# Altium PCB PCB_23GXSTM32F1031.0EXP_2026-02-23.pcbdoc (part 2 of 2)
Units mil, origin at the board's own origin, x right, y up, seen from the top; angles counter-clockwise.
Board outline 5147 x 5153.94 mil, 2 copper layers (Top Layer, Bottom Layer); 48 components, 78 nets, 348 pads, 55 vias.
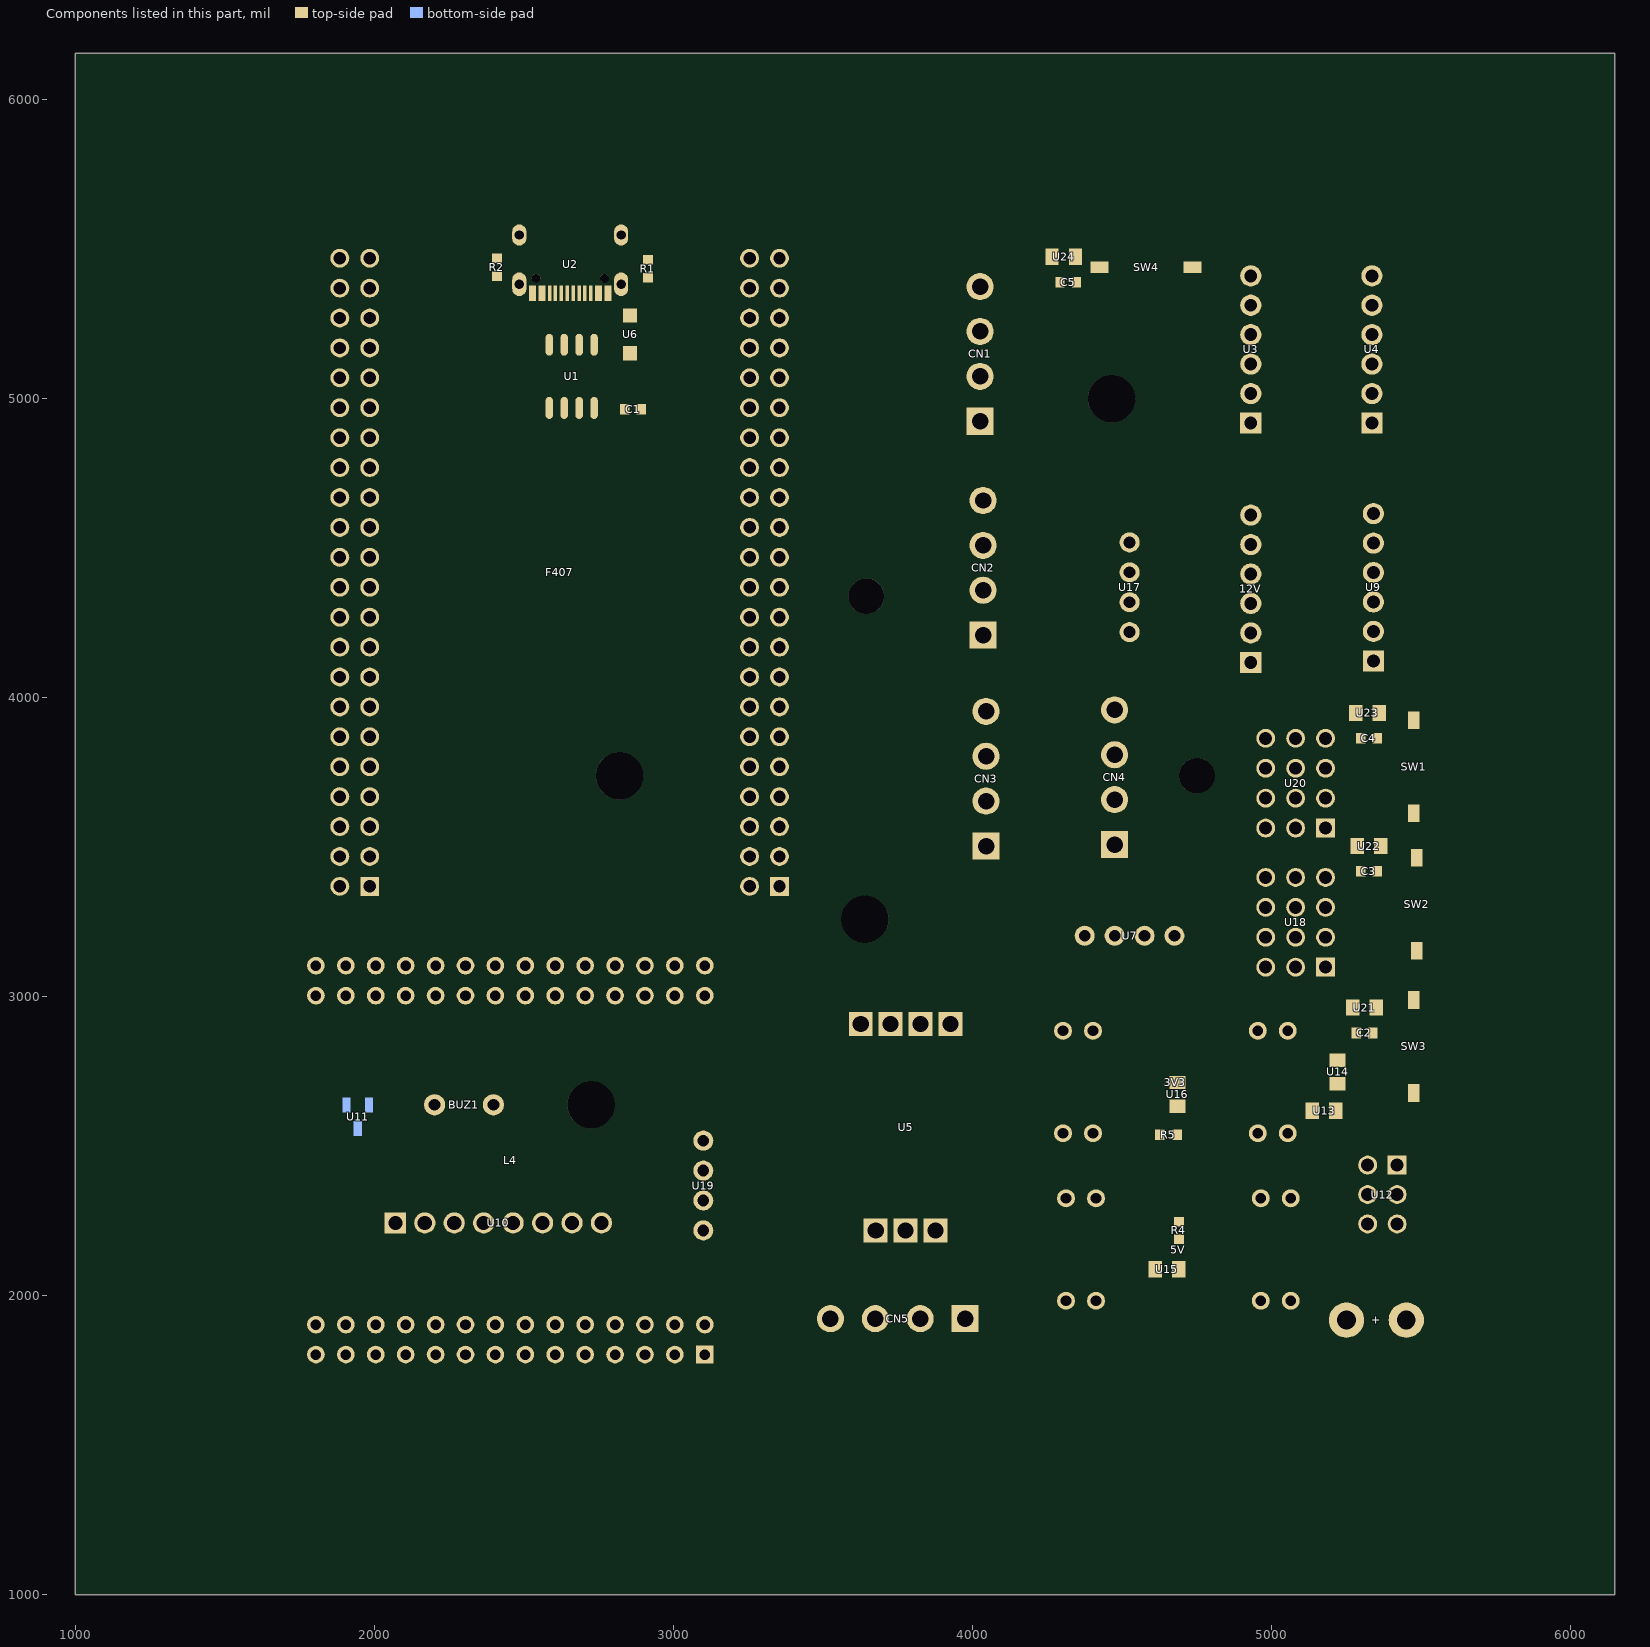
[diagram p2: the components of this part, seen from the top]

## Other copper
Top Layer:
  region net RX3: 2647.4,4992.09 2622.6,4992.09 2630,5007.09 2640,5007.09
  region net TX3: 2697.4,4943.46 2672.6,4943.46 2680,4928.46 2690,4928.46
  region net V3: 2747.4,4975.89 2747.4,4950.89 2762.4,4958.39 2762.4,4968.39
  region net D-: 2697.4,5203.31 2672.6,5203.31 2680,5218.31 2690,5218.31
  region net D+: 2747.4,5203.31 2722.6,5203.31 2730,5218.31 2740,5218.31
  region net 5V: 2572.6,4943.46 2572.6,4992.09 2535.1,4980.29 2535.1,4955.29
  region net 5V: 2597.4,4992.09 2572.6,4992.09 2580,5007.09 2590,5007.09
  region net OPRX: 3950,1968.66 4000,1968.66 3985,1998.66 3965,1998.66
  region net OPG: 3701.3,2178.39 3651.3,2178.39 3666.3,2148.39 3686.3,2148.39
  region net OPTX: 3801.3,2178.39 3751.3,2178.39 3766.3,2148.39 3786.3,2148.39
  region net OPRX: 3901.3,2178.39 3851.3,2178.39 3866.3,2148.39 3886.3,2148.39
  region net TX1: 3586.3,2895.89 3586.3,2920.89 3571.3,2913.39 3571.3,2903.39
  region net RX1: 3738.8,2868.39 3713.8,2868.39 3721.3,2853.39 3731.3,2853.39
  region net 5V: 3895.05,2948.39 3957.55,2948.39 3938.8,2985.89 3913.8,2985.89
  region net 5V: 3895.05,2948.39 3957.55,2948.39 3938.8,2957.09 3913.8,2957.09
  region net 5V: 3966.3,2939.64 3966.3,2877.14 4003.8,2895.89 4003.8,2920.89
  region net CC2: 2427.01,5455.59 2427.01,5480.59 2442.01,5473.09 2442.01,5463.09
  region net CC1: 2897.99,5475.59 2897.99,5450.59 2882.99,5458.09 2882.99,5468.09
  region net 3V3: 4609.47,2555.39 4609.47,2521.38 4579.47,2528.39 4579.47,2548.39
  region net M3V3: 4668.78,2555.39 4700.53,2555.39 4695,2585.39 4675,2585.39
  region net M3V3: 4700.53,2555.39 4700.53,2521.38 4730.53,2528.39 4730.53,2548.39
  region net M3V3: 4697.16,2521.38 4672.16,2521.38 4679.66,2506.38 4689.66,2506.38
  region net M5V: 4672.99,2172.86 4707.01,2172.86 4699.73,2142.86 4679.73,2142.86
  region net M5V: 4672.99,2201.23 4672.99,2176.23 4657.99,2183.73 4657.99,2193.73
  region net M3V3: 4660,2611.72 4710,2611.72 4695,2581.72 4675,2581.72
  region net 5V: 4588.34,2113.39 4588.34,2063.39 4558.34,2078.39 4558.34,2098.39
  region net M5V: 4667.08,2115.49 4711.66,2115.49 4699.74,2145.49 4679.74,2145.49
  region net M5V: 4711.66,2113.39 4711.66,2063.39 4741.66,2078.39 4741.66,2098.39
  region net M12V: 5195,2686.72 5245,2686.72 5230,2656.72 5210,2656.72
  region net 12V: 5113.34,2643.39 5113.34,2593.39 5085,2608.39 5085,2628.39
  region net M12V: 5195,2645.49 5236.66,2645.49 5230,2675.49 5210,2675.49
  region net M12V: 5236.66,2643.39 5236.66,2593.39 5266.66,2608.39 5266.66,2628.39
  region net PC5V: 2560.51,5325.39 2548.7,5325.39 2549.6,5310.39 2559.6,5310.39
  region net PC5V: 2572.32,5325.39 2560.51,5325.39 2561.4,5310.39 2571.4,5310.39
  region net PC5V: 2749.49,5325.39 2737.68,5325.39 2738.6,5310.39 2748.6,5310.39
  region net PC5V: 2761.3,5325.39 2749.49,5325.39 2750.4,5310.39 2760.4,5310.39
  region net CC2: 2580.2,5376.57 2592.01,5376.57 2591.1,5391.57 2581.1,5391.57
  region net D+: 2619.57,5376.57 2631.38,5376.57 2630.5,5391.57 2620.5,5391.57
  region net D-: 2651.06,5325.39 2639.25,5325.39 2640.2,5310.39 2650.2,5310.39
  region net D+: 2658.94,5376.57 2670.75,5376.57 2669.8,5391.57 2659.8,5391.57
  region net D+: 2670.75,5325.39 2658.94,5325.39 2659.8,5310.39 2669.8,5310.39
  region net D-: 2690.43,5325.39 2678.62,5325.39 2679.5,5310.39 2689.5,5310.39
  region net CC1: 2698.31,5376.57 2710.12,5376.57 2709.2,5391.57 2699.2,5391.57
  region net 5V: 2035.08,2230.89 2035.08,2255.89 2020.08,2248.39 2020.08,2238.39
  region net V3: 2821.69,4950.89 2821.69,4975.89 2806.69,4968.39 2806.69,4958.39
  region net 3V3VDE1: 4723,5458.07 4748,5458.07 4740.5,5473.07 4730.5,5473.07
  region net S$50933: 4394.96,5458.07 4417.32,5458.07 4396.89,5473.07 4382.75,5473.07
  region net S$51075: 5455.32,2959.37 5455.32,2981.7 5449.5,2970.46 5453.04,2959.85
  region net 3V3: 5455.32,2662.88 5455.32,2692.9 5437.31,2683.89 5437.31,2671.88
  region net 3V3: 5494.68,2692.9 5494.68,2662.88 5512.69,2671.88 5512.69,2683.89
  region net S$51065: 5465.32,3471.07 5465.32,3493.43 5450.32,3505.64 5450.32,3491.5
  region net 3V3: 5504.68,3167.9 5504.68,3137.88 5522.69,3146.88 5522.69,3158.89
  region net 3V3: 5469.99,3182.4 5500.01,3182.4 5491,3198.39 5479,3198.39
  region net S$50933: 4335.1,5406.1 4360.1,5406.1 4352.6,5421.1 4342.6,5421.1
  region net C5: 4243.34,5485.89 4243.34,5460.89 4228.34,5468.39 4228.34,5478.39
  region net S$50933: 4366.66,5485.89 4366.66,5460.89 4381.66,5468.39 4381.66,5478.39
  region net S$50933: 4360.1,5446.28 4335.1,5446.28 4342.6,5431.28 4352.6,5431.28
  region net S$51055: 5340.1,3881.1 5365.1,3881.1 5357.6,3896.1 5347.6,3896.1
  region net C4: 5258.34,3960.89 5258.34,3935.89 5243.34,3943.39 5243.34,3953.39
  region net S$51055: 5381.66,3960.89 5381.66,3935.89 5396.66,3943.39 5396.66,3953.39
  region net S$51055: 5365.1,3921.28 5340.1,3921.28 5347.6,3906.28 5357.6,3906.28
  region net S$51065: 5340.1,3436.1 5365.1,3436.1 5357.6,3451.1 5347.6,3451.1
  region net C0: 5263.34,3515.89 5263.34,3490.89 5248.34,3498.39 5248.34,3508.39
  region net S$51065: 5386.66,3515.89 5386.66,3490.89 5401.66,3498.39 5401.66,3508.39
  region net S$51065: 5365.1,3476.28 5342.08,3476.28 5347.6,3461.28 5357.6,3461.28
  region net S$51075: 5325.1,2896.1 5350.1,2896.1 5342.6,2911.1 5332.6,2911.1
  region net C1: 5248.34,2975.89 5248.34,2950.89 5245,2958.39 5245,2968.39
  region net S$51075: 5371.66,2975.89 5371.66,2950.89 5386.66,2958.39 5386.66,2968.39
  region net S$51075: 5350.1,2936.28 5327.08,2936.28 5332.6,2921.28 5342.6,2921.28
  region net S$51055: 5455.32,3931.07 5455.32,3953.43 5454.03,3951.92 5450.5,3941.32
  region net 3V3: 5494.68,3627.9 5494.68,3597.88 5512.69,3606.88 5512.69,3618.89
  region net 5V: 2867.5,5126.77 2842.5,5126.77 2850,5111.77 2860,5111.77
  region net PC5V: 2831.38,5263.88 2831.38,5288.88 2816.38,5281.38 2816.38,5271.38
  region net M5V: 4151,2295.45 4169,2295.45 4165,2287.05 4155,2287.05
  region net M3V3: 4151,2346.32 4169,2346.32 4165,2354.72 4155,2354.72
  region net M5V: 3453.42,2294.39 3453.42,2312.39 3445.02,2308.39 3445.02,2298.39
  region net M3V3: 3454.16,2329.39 3454.16,2347.39 3445.76,2343.39 3445.76,2333.39
  region net M5V: 3376,2246.32 3394,2246.32 3390,2254.72 3380,2254.72
  region net M3V3: 3392.94,2329.39 3392.94,2347.39 3401.34,2343.39 3401.34,2333.39
  region net C4: 2647.94,4209.39 2647.94,4227.39 2656.34,4223.39 2656.34,4213.39
  region net C5: 2637.94,4239.39 2637.94,4257.39 2646.34,4253.39 2646.34,4243.39
  region net C0: 2652.94,3414.39 2652.94,3432.39 2661.34,3428.39 2661.34,3418.39
  region net C1: 2642.94,3444.39 2642.94,3462.39 2651.34,3458.39 2651.34,3448.39
  region net C1: 4706.98,3452.63 4694.25,3465.36 4703.02,3468.47 4710.09,3461.4
  region net C0: 4691.98,3487.63 4679.25,3500.36 4688.02,3503.47 4695.09,3496.4
  region net C5: 3156,5066.32 3174,5066.32 3170,5074.72 3160,5074.72
  region net C5: 3156,4840.45 3174,4840.45 3170,4832.05 3160,4832.05
  region net C4: 4616,4020.45 4634,4020.45 4630,4012.05 4620,4012.05
  region net B0: 3440.41,4359.39 3440.41,4377.39 3432.01,4373.39 3432.01,4363.39
  region net B1: 3443.37,4309.39 3443.37,4327.39 3434.97,4323.39 3434.97,4313.39
  region net C4: 3442.06,4259.39 3442.06,4277.39 3433.66,4273.39 3433.66,4263.39
  region net D12: 3972.94,3129.39 3972.94,3147.39 3981.34,3143.39 3981.34,3133.39
  region net D13: 3972.94,3049.39 3972.94,3067.39 3981.34,3063.39 3981.34,3053.39
  region net D14: 3972.94,3019.39 3972.94,3037.39 3981.34,3033.39 3981.34,3023.39
  region net D15: 3972.94,2989.39 3972.94,3007.39 3981.34,3003.39 3981.34,2993.39
  region net D15: 2297.06,3284.39 2297.06,3302.39 2288.66,3298.39 2288.66,3288.39
  region net D14: 2297.06,3314.39 2297.06,3332.39 2288.66,3328.39 2288.66,3318.39
  region net D13: 2297.06,3344.39 2297.06,3362.39 2288.66,3358.39 2288.66,3348.39
  region net D12: 2297.06,3374.39 2297.06,3392.39 2288.66,3388.39 2288.66,3378.39
  region net RX5: 3544.24,3909.39 3544.24,3927.39 3552.64,3923.39 3552.64,3913.39
  region net TX5: 3544.98,3944.39 3544.98,3962.39 3553.38,3958.39 3553.38,3948.39
  region net SCL3: 4251.67,4436.86 4266.86,4446.53 4268.1,4437.36 4259.46,4431.86
  region net SDA3: 4246,4575.45 4264,4575.45 4260,4567.05 4250,4567.05
  region net SCL1: 3202.06,3299.39 3202.06,3317.39 3193.66,3313.39 3193.66,3303.39
  region net SDA1: 3207.06,3269.39 3207.06,3287.39 3198.66,3283.39 3198.66,3273.39
  region net SDA1: 3070.47,3309.25 3064.51,3292.26 3073.58,3292.74 3077.25,3303.2
  region net SCL1: 3062.94,3324.39 3062.94,3342.39 3071.34,3338.39 3071.34,3328.39
  region net RX2: 4202.94,3794.39 4202.94,3812.39 4211.34,3808.39 4211.34,3798.39
  region net TX2: 4232.94,3949.39 4232.94,3967.39 4241.34,3963.39 4241.34,3953.39
  region net PC5V: 2738.61,5292.16 2755.17,5299.22 2748.6,5305.55 2738.6,5301.29
  region net PC5V: 2744.13,5298.85 2761.12,5292.9 2760.4,5302.05 2750.4,5305.56
  region net PC5V: 2761.98,5289.14 2749.25,5276.41 2758.02,5273.3 2765.09,5280.37
  region net PC5V: 2565.75,5310.36 2553.02,5297.63 2551.06,5305.25 2558.14,5312.32
  region net PC5V: 2574.65,5305.52 2556.71,5307.07 2561.4,5315.09 2571.4,5314.23
  region net L4NSS1: 2036,2750.45 2054,2750.45 2050,2742.05 2040,2742.05
  region net L4NSS1: 1896,2766.32 1914,2766.32 1910,2774.72 1900,2774.72
  region net D-: 2633.99,5303.78 2651.06,5298.05 2650.2,5307.19 2640.2,5310.55
  region net D-: 2631,5285.45 2649,5285.45 2645,5277.05 2635,5277.05
  region net D-: 2695.75,5305.36 2683.02,5292.64 2680.97,5300.35 2688.04,5307.42
  region net L4SDA1: 3080.75,2491.01 3075.24,2540.9 3054.16,2518.39 3055.27,2508.39
  region net L4SCL1: 3077.87,2393.29 3077.87,2443.48 3060,2423.39 3060,2413.39
  region net 5V: 3122.13,2293.29 3122.13,2343.48 3145.56,2328.39 3145.56,2308.39
  region net D12: 4959.17,3374.76 4959.17,3422.01 4945,3403.39 4945,3393.39
  region net D13: 4959.17,3274.76 4959.17,3322.01 4937.12,3303.39 4937.12,3293.39
  region net D14: 4962.06,3172.5 4956.56,3219.42 4936.83,3198.39 4938,3188.39
  region net D15: 4965.25,3070.56 4954.23,3116.5 4937.1,3093.39 4939.5,3083.39
  region net 5V: 3558.96,1893.44 3491.04,1893.44 3515,1861.75 3535,1861.75
  region net 5V: 3543.21,1964.84 3481.6,1936.27 3489.41,1974.83 3508.74,1983.79
  region net 5V: 3495.05,1889.43 3495.05,1957.34 3463.36,1933.39 3463.36,1913.39
  region net OPG: 3641.68,1954.04 3709.58,1952.61 3686.3,1984.8 3666.3,1985.22
  region net OPTX: 3793.58,1955.99 3861.27,1950.48 3840,1984.01 3820,1985.64
  region net TX2: 4445.05,3924.43 4445.05,3992.34 4413.36,3963.39 4413.36,3953.39
  region net RX2: 4447.91,3772.11 4442.4,3839.8 4413.16,3808.39 4413.97,3798.39
  region net 5V: 4447.91,3622.11 4442.4,3689.8 4412.55,3665.89 4414.58,3640.89
  region net 5V: 4504.95,3624.43 4504.94,3692.34 4536.64,3670.89 4536.64,3645.89
  region net 5V: 4520.27,3658.15 4469.58,3703.34 4508.54,3711.07 4523.49,3697.74
  region net TX5: 4015.05,3919.43 4015.05,3987.34 3983.36,3958.39 3983.36,3948.39
  region net RX5: 4018.58,3766.62 4011.82,3834.19 3994.5,3803.39 3995.5,3793.39
  region net 5V: 4074.95,3619.43 4074.95,3687.34 4106.64,3665.89 4106.64,3640.89
  region net 5V: 4017.91,3617.11 4012.4,3684.8 3982.55,3660.89 3984.58,3635.89
  region net 3V3: 4424.87,2563.2 4419.58,2518.52 4441.89,2528.39 4444.26,2548.39
  region net 3V3: 4425.01,2563.05 4380.01,2563.03 4396.5,2584.04 4408.5,2584.04
  region net 12V: 5076.2,2563.03 5031.2,2563.03 5043.7,2584.03 5063.7,2584.03
  region net E15: 4907.34,5382.28 4905.86,5435.41 4889.86,5413.39 4890.14,5403.39
  region net E14: 4906.6,5337.65 4906.58,5284.5 4881.79,5306.09 4881.79,5316.09
  region net E13: 4906.86,5239.46 4906.32,5186.31 4881.74,5208.14 4881.84,5218.14
  region net E12: 5312.21,5382.39 5310.99,5435.52 5286.69,5413.39 5286.92,5403.39
  region net E11: 5313.11,5283.23 5310.15,5336.3 5286.59,5313.39 5287.14,5303.39
  region net E10: 5311.7,5239.31 5311.49,5186.16 5286.77,5207.84 5286.81,5217.84
  region net E6: 4956.59,4632.95 4903.44,4632.92 4925,4657.73 4935,4657.74
  region net E5: 4908.42,4482.99 4904.87,4536.02 4889.67,4513.39 4890.33,4503.39
  region net E4: 4906.9,4439.49 4906.29,4386.34 4881.73,4408.21 4881.85,4418.2
  region net E9: 5366.59,4637.95 5313.44,4637.92 5335,4662.73 5345,4662.74
  region net E8: 5318.17,4543.95 5315.09,4490.89 5299.71,4513.39 5300.29,4523.39
  region net E7: 5316.93,4444.51 5316.26,4391.37 5291.73,4413.25 5291.86,4423.25
  region net 5V: 2008.44,5447.35 2002.94,5494.28 2026.12,5485.89 2029.05,5460.89
  region net D12: 1915.33,4959.88 1872.77,4939.36 1898.85,4927.46 1908.39,4932.06
  region net D14: 1908.62,4847.55 1861.38,4847.55 1880,4833.39 1890,4833.39
  region net D13: 2005.83,4844.76 2005.83,4892.01 2027.88,4873.39 2027.88,4863.39
  region net D15: 2005.83,4744.76 2005.83,4792.01 2027.88,4773.39 2027.88,4763.39
  region net RX1: 1864.17,3544.76 1864.17,3592.01 1842.12,3573.39 1842.12,3563.39
  region net TX1: 2005.83,3544.76 2005.83,3592.01 2020,3573.39 2020,3563.39
  region net 3V3VDE1: 3378.3,5489.22 3331.06,5489.22 3349.68,5511.27 3359.68,5511.27
  region net RX3: 3378.45,4989.05 3331.21,4989.39 3349.99,5011.3 3359.99,5011.23
  region net TX3: 3233.85,4844.76 3233.85,4892.01 3211.8,4873.39 3211.8,4863.39
  region net E15: 3375.51,4844.76 3375.51,4892.01 3397.56,4873.39 3397.56,4863.39
  region net E14: 3278.31,4789.2 3231.07,4789.24 3249.7,4803.09 3259.7,4803.08
  region net E13: 3375.51,4744.76 3375.51,4792.01 3397.56,4773.39 3397.56,4763.39
  region net E12: 3284.19,4679.38 3240.08,4696.3 3264.93,4710.38 3275.15,4706.46
  region net E11: 3375.51,4644.76 3375.51,4692.01 3397.56,4673.39 3397.56,4663.39
  region net E10: 3285.05,4576.72 3242.61,4597.48 3268.77,4609.23 3278.27,4604.58
  region net E9: 3375.51,4544.76 3375.51,4592.01 3397.56,4573.39 3397.56,4563.39
  region net E8: 3286.17,4468.84 3250.29,4499.57 3278.76,4504.22 3286.38,4497.69
  region net E7: 3375.51,4444.76 3375.51,4492.01 3397.56,4473.39 3397.56,4463.39
  region net B1: 3286.02,4365.32 3247.71,4337.67 3275.66,4330.65 3283.88,4336.58
  region net B0: 3375.51,4344.76 3375.51,4392.01 3397.56,4373.39 3397.56,4363.39
  region net C5: 3233.85,4244.76 3233.85,4292.01 3211.8,4273.39 3211.8,4263.39
  region net C5: 3247.27,4237.77 3225.23,4279.56 3214.11,4253.39 3219.38,4243.39
  region net C4: 3375.51,4244.76 3375.51,4292.01 3397.56,4273.39 3397.56,4263.39
  region net C4: 3378.47,4247.74 3331.22,4247.36 3350,4228.35 3360,4228.43
  region net C1: 3236.74,3642.5 3231.23,3689.42 3211.5,3668.39 3212.68,3658.39
  region net C0: 3333.82,3644.78 3380.7,3650.65 3365,3626.46 3355,3625.21
  region net E6: 3375.51,3544.76 3375.51,3592.01 3397.56,3573.39 3397.56,3563.39
  region net E5: 3283.06,3482.05 3237.57,3494.83 3260.76,3511.22 3271.8,3508.12
  region net E4: 3375.51,3444.76 3375.51,3492.01 3397.56,3473.39 3397.56,3463.39
  region net 5V: 4325.81,1956.31 4284.17,1973.38 4287,1949.53 4307.06,1941.3
  region net 5V: 4292.69,1960.7 4292.67,2005.7 4271.67,1995.69 4271.68,1970.69
  region net 5V: 4435.01,2003.05 4390.01,2003.03 4402.5,2020.88 4422.5,2020.89
  region net 5V: 4600.1,3225.52 4549.9,3225.52 4562.5,3248.95 4587.5,3248.95
  region net M5V: 5299.97,2263.59 5299.94,2216.35 5277.9,2229.99 5277.92,2249.99
  region net M3V3: 5319.75,2369.86 5289.69,2333.42 5281.32,2357.92 5294.11,2373.42
  region net M12V: 5344.42,2457.63 5297.17,2457.64 5310.8,2479.69 5330.8,2479.68
  region net M12V: 5342.56,2414.04 5340.66,2461.25 5359.8,2443.39 5360.2,2433.39
  region net L4NSS1: 2636.49,2217.86 2689.46,2222.2 2670,2195.72 2660,2194.9
  region net DRDY: 2589.22,2266.82 2536.07,2266.82 2557.64,2291.63 2567.64,2291.63
  region net L4MISO1: 2490.78,2219.94 2437.63,2219.95 2459.2,2195.15 2469.2,2195.15
  region net L4MOSI1: 2392.15,2267.07 2339,2266.58 2360.35,2291.58 2370.35,2291.67
  region net L4SCK1: 2242.11,2218.53 2295.18,2221.44 2275,2195.49 2265,2194.94
  region net SDA3: 4502.87,4493.29 4502.87,4543.48 4479.44,4523.39 4479.44,4513.39
  region net SCL3: 4502.87,4393.29 4502.87,4443.48 4479.44,4423.39 4479.44,4413.39
  region net 5V: 4549.76,4340.9 4544.25,4291.01 4569.18,4303.39 4571.39,4323.39
  region net 5V: 1827.15,1922.92 1782.85,1922.92 1800,1943.59 1810,1943.59
  region net 5V: 1788.38,1878.98 1782.87,1922.93 1763.86,1908.39 1766.37,1888.39
  region net L4SCK1: 2027.15,1922.92 1982.85,1922.92 2000,1943.59 2010,1943.59
  region net L4SDA1: 2624.53,1781.24 2624.53,1825.53 2635,1808.39 2635,1798.39
  region net L4SCL1: 2727.15,1922.92 2682.85,1922.92 2700,1933.39 2710,1933.39
  region net L4NSS1: 1927.15,2983.86 1882.85,2983.86 1900,2963.19 1910,2963.19
  region net L4MISO1: 1931.94,3115.48 1913.64,3075.15 1939.4,3081.91 1943.82,3091.64
  region net L4MOSI1: 2027.15,2983.86 1982.85,2983.86 2000,2963.19 2010,2963.19
  region net DRDY: 2024.53,3081.24 2024.53,3125.53 2040,3108.39 2040,3098.39
Mid-Layer 2:
  region net TMOSI: 2527.15,3122.92 2482.85,3122.92 2500,3143.59 2510,3143.59
  region net TMISO: 2530.65,2988.77 2516.3,3030.67 2541.23,3021.68 2544.83,3011.15
  region net TNSS: 2424.53,2981.24 2424.53,3025.53 2435,3008.39 2435,2998.39
  region net TSCK: 2324.53,2981.24 2324.53,3025.53 2345,3008.39 2345,2998.39
  region net C1: 2227.15,3122.92 2182.85,3122.92 2200,3143.59 2210,3143.59
  region net C0: 2230.65,2988.77 2216.3,3030.67 2241.23,3021.68 2244.83,3011.15
  region net C5: 2127.15,3122.92 2082.85,3122.92 2100,3143.59 2110,3143.59
  region net C4: 2124.53,2981.24 2124.53,3025.53 2140,3008.39 2140,2998.39
  region net M12V: 2227.15,1783.86 2182.85,1783.86 2200,1763.19 2210,1763.19
  region net B13: 3375.51,5044.76 3375.51,5092.01 3397.56,5073.39 3397.56,5063.39
  region net B14: 3285.65,5074.08 3245.16,5098.41 3272.34,5107.8 3281.18,5102.49
  region net TMISO: 2546,3210.45 2564,3210.45 2560,3202.05 2550,3202.05
  region net TNSS: 2446,3255.45 2464,3255.45 2460,3247.05 2450,3247.05
  region net TMOSI: 2496,3225.45 2514,3225.45 2510,3217.05 2500,3217.05
  region net TSCK: 2406,3250.45 2424,3250.45 2420,3243.39 2410,3243.39
  region net TX5: 3097.94,4109.39 3097.94,4127.39 3106.34,4123.39 3106.34,4113.39
  region net RX5: 3087.94,3959.39 3087.94,3977.39 3096.34,3973.39 3096.34,3963.39
  region net SDA3: 3071,4576.32 3089,4576.32 3085,4583.39 3075,4583.39
  region net SCL3: 3087.94,4509.39 3087.94,4527.39 3096.34,4523.39 3096.34,4513.39
  region net SDA3: 4247.06,4574.39 4247.06,4592.39 4238.66,4588.39 4238.66,4578.39
  region net SCL3: 4247.06,4439.39 4247.06,4457.39 4238.66,4453.39 4238.66,4443.39
  region net TX5: 3529.1,3944.39 3529.1,3962.39 3520.7,3958.39 3520.7,3948.39
  region net RX5: 3528.36,3909.39 3528.36,3927.39 3519.96,3923.39 3519.96,3913.39
  region net D12: 2312.94,3374.39 2312.94,3392.39 2321.34,3388.39 2321.34,3378.39
  region net D13: 2312.94,3344.39 2312.94,3362.39 2321.34,3358.39 2321.34,3348.39
  region net D14: 2312.94,3314.39 2312.94,3332.39 2321.34,3328.39 2321.34,3318.39
  region net D15: 2312.94,3284.39 2312.94,3302.39 2321.34,3298.39 2321.34,3288.39
  region net D15: 3957.06,2989.39 3957.06,3007.39 3948.66,3003.39 3948.66,2993.39
  region net D14: 3957.06,3019.39 3957.06,3037.39 3948.66,3033.39 3948.66,3023.39
  region net D13: 3957.06,3049.39 3957.06,3067.39 3948.66,3063.39 3948.66,3053.39
  region net D12: 3957.06,3129.39 3957.06,3147.39 3948.66,3143.39 3948.66,3133.39
  region net C4: 3441,4260.45 3459,4260.45 3455,4252.05 3445,4252.05
  region net B1: 3459.25,4309.39 3459.25,4327.39 3467.65,4323.39 3467.65,4313.39
  region net B0: 3456.29,4359.39 3456.29,4377.39 3464.69,4373.39 3464.69,4363.39
  region net B14: 4213.75,5129.39 4213.75,5147.39 4205.35,5143.39 4205.35,5133.39
  region net B13: 4210.75,5004.39 4210.75,5022.39 4202.35,5018.39 4202.35,5008.39
  region net B0: 4622.06,4069.39 4622.06,4087.39 4613.66,4083.39 4613.66,4073.39
  region net B1: 4657.06,4044.39 4657.06,4062.39 4648.66,4058.39 4648.66,4048.39
  region net C4: 4617.06,4019.39 4617.06,4037.39 4608.66,4033.39 4608.66,4023.39
  region net C1: 2627.06,3444.39 2627.06,3462.39 2618.66,3458.39 2618.66,3448.39
  region net C0: 2637.06,3414.39 2637.06,3432.39 2628.66,3428.39 2628.66,3418.39
  region net C5: 2622.06,4239.39 2622.06,4257.39 2613.66,4253.39 2613.66,4243.39
  region net C4: 2632.06,4209.39 2632.06,4227.39 2623.66,4223.39 2623.66,4213.39
  region net M12V: 3457.06,1734.39 3457.06,1752.39 3448.66,1748.39 3448.66,1738.39
Bottom Layer:
  region net 12V: 4965.41,4952.71 4965.41,4881.85 5040.41,4892.28 5040.41,4942.28
  region net 12V: 4894.54,4881.85 4894.54,4952.71 4848.9,4942.28 4848.9,4892.28
  region net 12V: 5299.54,4881.85 5299.54,4952.71 5224.54,4942.28 5224.54,4892.28
  region net 12V: 4965.41,4152.71 4965.41,4081.85 5040.41,4092.28 5040.41,4142.28
  region net 12V: 4894.54,4081.85 4894.54,4152.71 4836.1,4142.28 4836.1,4092.28
  region net 12V: 5375.41,4086.85 5304.54,4086.85 5315,4011.85 5365,4011.85
  region net 12V: 5304.54,4086.85 5304.54,4157.71 5229.54,4142.28 5229.54,4092.28
  region net 3V3: 1932.5,2534.41 1957.5,2534.41 1950,2519.41 1940,2519.41
  region net BUZSWT: 1996.18,2625.29 1996.18,2650.29 2011.18,2642.79 2011.18,2632.79
  region net G: 1893.82,2650.29 1893.82,2625.29 1878.82,2632.79 1878.82,2642.79
  region net M5V: 4152.06,2294.39 4152.06,2312.39 4143.66,2308.39 4143.66,2298.39
  region net M3V3: 4152.06,2329.39 4152.06,2347.39 4143.66,2343.39 4143.66,2333.39
  region net M5V: 3469.29,2294.39 3469.29,2312.39 3477.69,2308.39 3477.69,2298.39
  region net M3V3: 3470.03,2329.39 3470.03,2347.39 3478.43,2343.39 3478.43,2333.39
  region net M5V: 3376,2230.45 3394,2230.45 3390,2222.05 3380,2222.05
  region net M3V3: 3385.75,2326.41 3373.02,2339.14 3369.91,2330.37 3376.98,2323.3
  region net C1: 4695.75,3441.41 4683.02,3454.14 4679.91,3445.37 4686.98,3438.3
  region net C0: 4680.75,3476.41 4668.02,3489.14 4664.91,3480.37 4671.98,3473.3
  region net C5: 3156,5050.45 3174,5050.45 3170,5042.05 3160,5042.05
  region net C5: 3156,4856.32 3174,4856.32 3170,4864.72 3160,4864.72
  region net B1: 4672.94,4044.39 4672.94,4062.39 4681.34,4058.39 4681.34,4048.39
  region net B0: 4637.94,4069.39 4637.94,4087.39 4646.34,4083.39 4646.34,4073.39
  region net B13: 4227.69,5021.33 4209.69,5021.32 4213.69,5029.72 4223.69,5029.72
  region net B14: 4229.63,5129.39 4229.63,5147.39 4238.03,5143.39 4238.03,5133.39
  region net SCL3: 3072.06,4509.39 3072.06,4527.39 3063.66,4523.39 3063.66,4513.39
  region net SDA3: 3072.06,4559.39 3072.06,4577.39 3063.66,4573.39 3063.66,4563.39
  region net SCL1: 3217.94,3299.39 3217.94,3317.39 3226.34,3313.39 3226.34,3303.39
  region net SDA1: 3206,3270.45 3224,3270.45 3220,3262.05 3210,3262.05
  region net SDA1: 3052.06,3294.39 3052.06,3312.39 3043.66,3308.39 3043.66,3298.39
  region net SCL1: 3047.06,3324.39 3047.06,3342.39 3038.66,3338.39 3038.66,3328.39
  region net RX2: 4186,3811.32 4204,3811.32 4200,3819.72 4190,3819.72
  region net TX2: 4216,3966.32 4234,3966.32 4230,3974.72 4220,3974.72
  region net RX5: 3072.06,3959.39 3072.06,3977.39 3063.66,3973.39 3063.66,3963.39
  region net TX5: 3082.06,4109.39 3082.06,4127.39 3073.66,4123.39 3073.66,4113.39
  region net PC5V: 2755.86,5277.91 2738.88,5283.88 2739.35,5274.81 2749.82,5271.13
  region net PC5V: 2572.94,5289.39 2572.94,5307.39 2581.34,5303.39 2581.34,5293.39
  region net TSCK: 2406,3266.32 2424,3266.32 2420,3274.72 2410,3274.72
  region net TMOSI: 2497.06,3224.39 2497.06,3242.39 2488.66,3238.39 2488.66,3228.39
  region net TNSS: 2462.94,3254.39 2462.94,3272.39 2471.34,3268.39 2471.34,3258.39
  region net TMISO: 2555.75,3206.41 2543.02,3219.14 2541.46,3211.92 2548.54,3204.85
  region net L4NSS1: 2037.06,2749.39 2037.06,2767.39 2028.66,2763.39 2028.66,2753.39
  region net L4NSS1: 1912.94,2749.39 1912.94,2767.39 1921.34,2763.39 1921.34,2753.39
  region net D-: 2647.94,5284.39 2647.94,5302.39 2656.34,5298.39 2656.34,5288.39
  region net D-: 2687.06,5284.39 2687.06,5302.39 2678.66,5298.39 2678.66,5288.39
  region net B14: 5003.62,3884.22 4956.38,3884.22 4975,3906.27 4985,3906.27
  region net 5V: 5103.62,3842.55 5056.38,3842.55 5070,3820.51 5090,3820.51
  region net B13: 4962.72,3737.06 4956.04,3783.82 4944.29,3763.39 4945.71,3753.39
  region net 5V: 5103.62,3742.55 5056.38,3742.55 5070,3720.51 5090,3720.51
  region net 5V: 5103.62,3784.22 5056.38,3784.22 5070,3806.27 5090,3806.27
  region net B0: 4959.17,3639.76 4959.17,3687.01 4937.12,3668.39 4937.12,3658.39
  region net 5V: 5103.62,3642.55 5056.38,3642.55 5070,3620.51 5090,3620.51
  region net 5V: 5103.62,3684.22 5056.38,3684.22 5070,3706.27 5090,3706.27
  region net B1: 4959.17,3539.76 4959.17,3587.01 4937.12,3568.39 4937.12,3558.39
  region net 5V: 5103.62,3542.55 5056.38,3542.55 5070,3520.51 5090,3520.51
  region net 5V: 5103.62,3584.22 5056.38,3584.22 5070,3606.27 5090,3606.27
  region net BUZSWT: 2178.48,2611.52 2177.81,2664.67 2153.28,2642.79 2153.41,2632.79
  region net 5V: 5103.62,3377.55 5056.38,3377.55 5070,3355.51 5090,3355.51
  region net 5V: 5103.62,3419.22 5056.38,3419.22 5070,3441.27 5090,3441.27
  region net 5V: 5103.62,3277.55 5056.38,3277.55 5070,3255.51 5090,3255.51
  region net 5V: 5103.62,3319.22 5056.38,3319.22 5070,3341.27 5090,3341.27
  region net 5V: 5103.62,3177.55 5056.38,3177.55 5070,3155.51 5090,3155.51
  region net 5V: 5103.62,3219.22 5056.38,3219.22 5070,3241.27 5090,3241.27
  region net 5V: 5058.97,3074.94 5105.89,3080.45 5095,3056.97 5075,3054.62
  region net 5V: 5103.62,3119.22 5056.38,3119.22 5070,3141.27 5090,3141.27
  region net 5V: 4445.06,3692.34 4445.05,3624.43 4413.36,3645.89 4413.36,3670.89
  region net TX4: 4005.05,4624.43 4005.05,4692.34 3973.36,4663.39 3973.36,4653.39
  region net RX4: 4005.05,4474.43 4005.05,4542.34 3973.36,4513.39 3973.36,4503.39
  region net 5V: 4072.31,4384.03 4055.78,4318.16 4091.65,4330.89 4097.92,4355.89
  region net 5V: 4079.1,4368.63 4019.32,4400.86 4052.77,4418.83 4075.74,4406.45
  region net 3V3: 4322.37,2565.7 4322.35,2520.7 4343.36,2533.19 4343.37,2553.19
  region net 3V3: 4325.02,2563.05 4280.02,2563.05 4290.02,2575.87 4315.02,2575.87
  region net 3V3: 4282.68,2520.71 4282.68,2565.71 4261.68,2553.21 4261.68,2533.21
  region net 3V3: 4382.68,2520.69 4382.67,2565.69 4361.67,2553.19 4361.68,2533.19
  region net 12V: 4933.86,2520.69 4933.85,2565.69 4912.85,2568.19 4912.86,2518.19
  region net 12V: 4973.55,2565.69 4973.54,2520.69 4994.54,2518.19 4994.55,2568.19
  region net 12V: 5033.86,2520.69 5033.86,2565.69 5012.86,2568.19 5012.86,2518.19
  region net 12V: 5076.2,2563.03 5031.2,2563.03 5028.7,2584.03 5078.7,2584.03
  region net TX6: 3997.91,5337.11 3992.4,5404.8 3963.16,5373.39 3963.97,5363.39
  region net RX6: 3995.05,5189.43 3995.05,5257.34 3963.36,5228.39 3963.36,5218.39
  region net 5V: 4057.6,5104.8 4052.09,5037.11 4085.42,5055.89 4087.45,5080.89
  region net 3V3: 1864.17,5344.76 1864.17,5392.01 1842.12,5380.89 1842.12,5355.89
  region net TX6: 1915.95,4774.25 1875.31,4798.36 1902.44,4807.9 1911.32,4802.63
  region net RX6: 2005.83,4644.76 2005.83,4692.01 2027.88,4673.39 2027.88,4663.39
  region net SCL3: 1916.33,4565.15 1877.87,4537.71 1905.78,4530.54 1914.03,4536.42
  region net SDA3: 2005.83,4544.76 2005.83,4592.01 2027.88,4573.39 2027.88,4563.39
  region net TX4: 1914.45,4279.55 1870.24,4296.21 1894.99,4310.45 1905.26,4306.57
  region net TX5: 1915.95,4162.52 1875.31,4138.42 1902.44,4128.87 1911.32,4134.14
  region net RX4: 2005.83,4144.76 2005.83,4192.01 2027.88,4173.39 2027.88,4163.39
  region net RX5: 2005.83,3944.76 2005.83,3992.01 2027.88,3973.39 2027.88,3963.39
  region net SDA1: 1908.62,3447.55 1861.38,3447.55 1880,3433.39 1890,3433.39
  region net SCL1: 2005.83,3444.76 2005.83,3492.01 2020,3473.39 2020,3463.39
  region net TMOSI: 3278.45,4147.72 3231.21,4147.38 3249.99,4125.47 3259.99,4125.54
  region net TMISO: 3378.47,4189.03 3331.22,4189.41 3350,4208.43 3360,4208.35
  region net TSCK: 3233.85,4044.76 3233.85,4092.01 3215,4073.39 3215,4063.39
  region net TNSS: 3378.45,4047.72 3331.21,4047.38 3349.99,4025.47 3359.99,4025.54
  region net RX2: 3283.06,3954.72 3237.57,3941.94 3260.76,3925.55 3271.8,3928.66
  region net TX2: 3385.32,3961.09 3358.08,3999.7 3386.79,3997.25 3392.64,3988.96
  region net C1: 3284.19,3657.4 3240.08,3640.48 3264.92,3626.39 3275.15,3630.31
  region net C0: 3375.51,3644.76 3375.51,3692.01 3397.56,3673.39 3397.56,3663.39
  region net 12V: 5210.94,1874.09 5210.94,1962.68 5169.6,1943.39 5169.6,1893.39
  region net 5V: 4332.37,2005.7 4332.35,1960.7 4353.36,1973.19 4353.37,1993.19
  region net 5V: 4392.68,1960.69 4392.67,2005.69 4371.67,1993.19 4371.68,1973.19
  region net 12V: 4943.86,1960.69 4943.85,2005.69 4925.19,2008.19 4925.21,1958.19
  region net 12V: 4983.55,2005.69 4983.54,1960.69 5004.54,1958.19 5004.55,2008.19
  region net 12V: 5043.86,1960.69 5043.86,2005.69 5022.86,2008.19 5022.86,1958.19
  region net 12V: 5061.82,1953.24 5093.64,1985.06 5110.26,1971.98 5074.9,1936.63
  region net SDA1: 4400.1,3181.25 4349.9,3181.25 4370,3157.83 4380,3157.83
  region net SCL1: 4500.1,3225.52 4449.9,3225.52 4470,3243.39 4480,3243.39
  region net 5V: 4600.1,3181.25 4549.9,3181.25 4565,3157.83 4585,3157.83
  region net 3V3: 1927.15,1922.92 1882.85,1922.92 1900,1943.59 1910,1943.59
  region net 3V3: 1885.47,1881.24 1885.47,1925.53 1865,1913.39 1865,1893.39
  region net M3V3: 2127.15,1922.92 2082.85,1922.92 2100,1943.59 2110,1943.59
  region net M5V: 2124.53,1781.24 2124.53,1825.53 2135,1808.39 2135,1798.39
  region net G: 1801.64,3074.05 1776.32,3110.39 1769.11,3084.57 1774.92,3076.24

## Silkscreen, mask and mechanical layers (free items; w line width, h text height)
Top Overlay:
  text "E15" at 4837.5,5391.46 h45 r90
  text "E12" at 5242.5,5386.46 h45 r90
  text "C6" at 3907.5,5323.39 h45 r90
  text "E14" at 4837.5,5296.46 h45 r90
  text "E11" at 5242.5,5291.46 h45 r90
  text "E13" at 4837.5,5191.46 h45 r90
  text "E10" at 5242.5,5186.46 h45 r90
  text "C7" at 3907.5,5168.39 h45 r90
  text "5V" at 3902.5,5033.39 h45 r90
  text "G" at 4802.5,5016.46 h45 r270
  text "G" at 5207.5,5011.46 h45 r270
  text "G" at 3862.5,4893.39 h45 r270
  text "12V" at 4847.5,4881.46 h45 r90
  text "12V" at 5252.5,4876.46 h45 r90
  text "C10" at 3907.5,4598.39 h45 r90
  text "E6" at 5237.5,4596.46 h45 r90
  text "E6" at 4827.5,4573.39 h45 r90
  text "E5" at 5237.5,4501.46 h45 r90
  text "C9" at 4387.5,4488.39 h45 r90
  text "E5" at 4827.5,4478.39 h45 r90
  text "C11" at 3907.5,4443.39 h45 r90
  text "E4" at 5237.5,4396.46 h45 r90
  text "A8" at 4387.5,4378.39 h45 r90
  text "E4" at 4827.5,4373.39 h45 r90
  text "5V" at 3902.5,4308.39 h45 r90
  text "5V" at 4387.5,4268.39 h45 r90
  text "G" at 5202.5,4221.46 h45 r270
  text "G" at 4792.5,4198.39 h45 r270
  text "G" at 4342.5,4188.39 h45 r270
  text "G" at 3862.5,4168.39 h45 r270
  text "12V" at 5247.5,4086.46 h45 r90
  text "C12" at 3912.5,3908.39 h45 r90
  text "A2" at 4722.5,3898.39 h45 r90
  text "B14" at 4825,3815.89 h45
  text "D2" at 3912.5,3753.39 h45 r90
  text "A3" at 4722.5,3743.39 h45 r90
  text "B13" at 4825,3715.89 h45
  text "5V" at 3907.5,3618.39 h45 r90
  text "B0" at 4840,3615.89 h45
  text "5V" at 4717.5,3608.39 h45 r90
  text "B1" at 4850,3520.89 h45
  text "G" at 3867.5,3478.39 h45 r270
  text "G" at 4677.5,3468.39 h45 r270
  text "D12" at 4825,3355.89 h45
  text "G" at 4640.65,3332.34 h45 r180
  text "B9" at 4340.65,3287.34 h45
  text "B8" at 4420.65,3287.34 h45
  text "5V" at 4530.65,3287.34 h45
  text "D13" at 4825,3255.89 h45
  text "D14" at 4825,3145.89 h45
  text "D15" at 4825,3050.89 h45
  text "G" at 5165,3005.89 h45 r180
  text "+5V" at 5015,2960.89 h45
  text "G" at 5405,2570.89 h45 r180
  text "AIN" at 5280,2525.89 h45
  text "B7" at 2933.41,2517.67 h45 r211
  text "B6" at 2962.5,2393.39 h45 r90
  text "5V" at 2967.5,2278.39 h45 r90
  text "G" at 2927.5,2183.39 h45 r270

## Text inside footprints (layer, text, board x,y; h text height)
F407: Top Overlay "5V" at 2055,5424.76 h47.24; Top Overlay "3V3" at 2055,5324.76 h47.24; Top Overlay "GND" at 2055,5224.76 h47.24; Top Overlay "PD8 PB15" at 2055,5124.76 h47.24; Top Overlay "PD10 PD9" at 2055,5024.76 h47.24; Top Overlay "PD12 PD11" at 2055,4924.76 h47.24; Top Overlay "PD14 PD13" at 2055,4824.76 h47.24; Top Overlay "PC6 PD15" at 2055,4724.76 h47.24; Top Overlay "PC8 PC7" at 2055,4624.76 h47.24; Top Overlay "PA8 PC9" at 2055,4524.76 h47.24; Top Overlay "PA9<TX1>PA10<RX1>" at 2055,4424.76 h47.24; Top Overlay "PA12 PA11" at 2055,4324.76 h47.24; Top Overlay "PC10 PA15" at 2055,4224.76 h47.24; Top Overlay "PC12 PC11" at 2055,4124.76 h47.24; Top Overlay "PD1 PD0" at 2050,4034.76 h47.24; Top Overlay "PD3 PD2" at 2055,3924.76 h47.24; Top Overlay "PD5 PD4" at 2055,3824.76 h47.24; Top Overlay "PD7 PD6" at 2055,3724.76 h47.24; Top Overlay "PB5 PB3" at 2055,3624.76 h47.24; Top Overlay "PB7 PB6" at 2055,3524.76 h47.24; Top Overlay "PB9 PB8" at 2055,3424.76 h47.24; Top Overlay "PE1 PE0" at 2055,3324.76 h47.24; Top Overlay "PE3 PE2" at 3424.68,3324.76 h47.24; Top Overlay "PE5 PE4" at 3424.68,3424.76 h47.24; Top Overlay "PC13 PE6" at 3424.68,3524.76 h47.24; Top Overlay "PC1 PC0" at 3424.68,3624.76 h47.24; Top Overlay "PC3 PC2" at 3424.68,3724.76 h47.24; Top Overlay "PA1 PA0" at 3424.68,3824.76 h47.24; Top Overlay "PA3 PA2" at 3424.68,3924.76 h47.24; Top Overlay "PA5 PA4" at 3419.68,4034.76 h47.24; Top Overlay "PA7 PA6" at 3424.68,4124.76 h47.24; Top Overlay "PC5 PC4" at 3424.68,4224.76 h47.24; Top Overlay "PB1 PB0" at 3424.68,4324.76 h47.24; Top Overlay "PE8 PE7" at 3424.68,4424.76 h47.24; Top Overlay "PE10 PE9" at 3424.68,4524.76 h47.24; Top Overlay "PE12 PE11" at 3424.68,4624.76 h47.24; Top Overlay "PE14 PE13" at 3424.68,4724.76 h47.24; Top Overlay "PB10 PE15" at 3424.68,4824.76 h47.24; Top Overlay "PB12 PB11" at 3424.68,4924.76 h47.24; Top Overlay "PB14 PB13" at 3424.68,5024.76 h47.24; Top Overlay "VDDA VREF+" at 3424.68,5124.76 h47.24; Top Overlay "GND" at 3424.68,5224.76 h47.24; Top Overlay "GND" at 3424.68,5324.76 h47.24; Top Overlay "3V3" at 3424.68,5424.76 h47.24
L4: Bottom Overlay "A3" at 1780,2919.39 h37 r180; Bottom Overlay "A4" at 1778,2964.39 h37 r180; Bottom Overlay "A7" at 1979,2919.39 h37 r180; Bottom Overlay "C4" at 1967.31,2962.22 h37 r208; Bottom Overlay "C5" at 2075,2919.39 h37 r180; Bottom Overlay "B0" at 2081,2964.39 h37 r180; Bottom Overlay "B1" at 2183,2919.39 h37 r180; Bottom Overlay "B2" at 2180,2964.39 h37 r180; Bottom Overlay "B12" at 2373,2919.39 h37 r180; Bottom Overlay "B13" at 2373,2964.39 h37 r180; Bottom Overlay "B14" at 2471,2919.39 h37 r180; Bottom Overlay "B15" at 2473,2964.39 h37 r180; Bottom Overlay "C6" at 2578,2919.39 h37 r180; Bottom Overlay "C7" at 2593.52,2935.81 h37 r57; Bottom Overlay "C8" at 2677,2919.39 h37 r180; Bottom Overlay "C9" at 2678,2964.39 h37 r180; Bottom Overlay "A8" at 2771,2919.39 h37 r180; Bottom Overlay "A10" at 2867,2919.39 h37 r180; Bottom Overlay "A11" at 2873,2964.39 h37 r180; Bottom Overlay "A12" at 2963,2919.39 h37 r180; Bottom Overlay "A13" at 2961,2964.39 h37 r180; Bottom Overlay "5V" at 1835,1985.39 h37; Bottom Overlay "GND" at 1855,1940.39 h37; Bottom Overlay "3.3" at 1940,1985.39 h37; Bottom Overlay "A2" at 1936,1940.39 h37; Bottom Overlay "A1" at 2036,1985.39 h37; Bottom Overlay "A0" at 2037,1940.39 h37; Bottom Overlay "C3" at 2135,1985.39 h37; Bottom Overlay "C2" at 2136,1940.39 h37; Bottom Overlay "C1" at 2232,1985.39 h37; Bottom Overlay "C0" at 2236,1940.39 h37; Bottom Overlay "RST" at 2337,1985.39 h37; Bottom Overlay "C15" at 2344,1940.39 h37; Bottom Overlay "C14" at 2450,1985.39 h37; Bottom Overlay "C13" at 2452,1940.39 h37; Bottom Overlay "BAT" at 2551,1985.39 h37; Bottom Overlay "B8" at 2536,1940.39 h37; Bottom Overlay "B8" at 2632,1985.39 h37; Bottom Overlay "B7" at 2632,1940.39 h37; Bottom Overlay "B6" at 2734,1985.39 h37; Bottom Overlay "B5" at 2734,1940.39 h37; Bottom Overlay "B4" at 2835,1985.39 h37; Bottom Overlay "B3" at 2834,1940.39 h37; Bottom Overlay "D2" at 2934,1985.39 h37; Bottom Overlay "C12" at 2945,1940.39 h37; Bottom Overlay "C11" at 3049,1985.39 h37; Bottom Overlay "C10" at 3051,1940.39 h37; Bottom Overlay "A15" at 3152,1985.39 h37; Bottom Overlay "A14" at 3152,1940.39 h37; Bottom Overlay "GND" at 3061,2941.39 h37 r180; Bottom Overlay "B10" at 2267,2919.39 h37 r180; Bottom Overlay "A9" at 2769,2964.39 h37 r180; Bottom Overlay "A6" at 1871,2964.39 h37 r180; Bottom Overlay "A5" at 1871,2919.39 h37 r180; Bottom Overlay "B11" at 2269.63,2966.76 h37 r180
U5: Top Overlay "TTL" at 3998.1,2913.39 h43.81 r270; Top Overlay "+5V" at 3889.5,2859.93 h57.42 r270; Top Overlay "G" at 3846.69,2858.39 h56.96 r90; Top Overlay "TXD" at 3699.5,2859.93 h57.42 r270; Top Overlay "RXD" at 3599.5,2859.93 h57.42 r270; Top Overlay "G" at 3706.69,2328.39 h56.96 r90; Top Overlay "RXD" at 3849.5,2419.93 h57.42 r270; Top Overlay "TXD" at 3749.5,2419.93 h57.42 r270; Top Overlay "RS232" at 3971.29,2443.39 h57.42 r270